# EAGLE board IN12_blank_board.v1 (EAGLE 5.07)

Size 60 x 60 mm. Coordinates in mm from the lower left corner, seen from the top.
Copper layers (1*16): Top 0.035mm / dielectric 1.5mm / Bottom 0.035mm
Design rules "SparkFun": minimum track width 8mil, minimum drill 20mil, track to track 8mil, track to pad 8mil, pad to pad 8mil, via to via 8mil, smd to smd 8mil, copper to edge 10mil, drill to drill 8mil, minimum pad ring 12mil, minimum via ring 10mil, stop-mask expansion 4mil, vias tented up to drill 25mil, thermal gap 10mil

## Footprints (pad centres in the part's own frame; a part is rotated, then mirrored left to right if it is on the bottom)
DISP_IN-12_SOCKET = hole 3: 5,16; -5,-16
DP6060_V1 = hole 3.2: 4,4; 56,4; 56,56; 4,56

## Placement (x,y rotation side)
D1  [DISP_IN-12_SOCKET]  15,30 0 top
D2  [DISP_IN-12_SOCKET]  45,30 0 top
PCB2  PCB_DP_SQUARE-6X6  [DP6060_V1]  0,0 0 top
U$1  FRAME_DINA4_L  [DP_LOGO]  62.68,4.92 0 top
U$2  [DP_LOGO_ART_2X2]  4.5,7 0 top
U$3  [LOGO_CC-0]  8,51 0 top
U$4  [OSHW_8X200_NOTEXT]  43,51 0 top

## Library data of the parts
D1 D2 PCB2 U$2 U$3 = dp_devices
U$1 = dp_devices; FF1: fulfillment by; FF2: Seeed Studio; FF3: www.seeedstudio.com; LICENSE: CC-0; PROJECT: IV-22 board; URL1: http://; URL2: DangerousPrototypes.com
U$4 = ohw-logo

## Text on the board
tNames: Nixie Board v1.0 | AUG 2012 | http://dangerousprototypes.com
bNames: Fulfillment By: | Seeed Studio | www.seeedstudio.com